# Altium PCB 变压器电源.PcbDoc
Units mm, origin at the board's own origin, x right, y up, seen from the top; angles counter-clockwise.
Board outline 152.4 x 101.6 mm, 2 copper layers (Top Layer, Bottom Layer); 46 components, 17 nets, 139 pads, 0 vias.
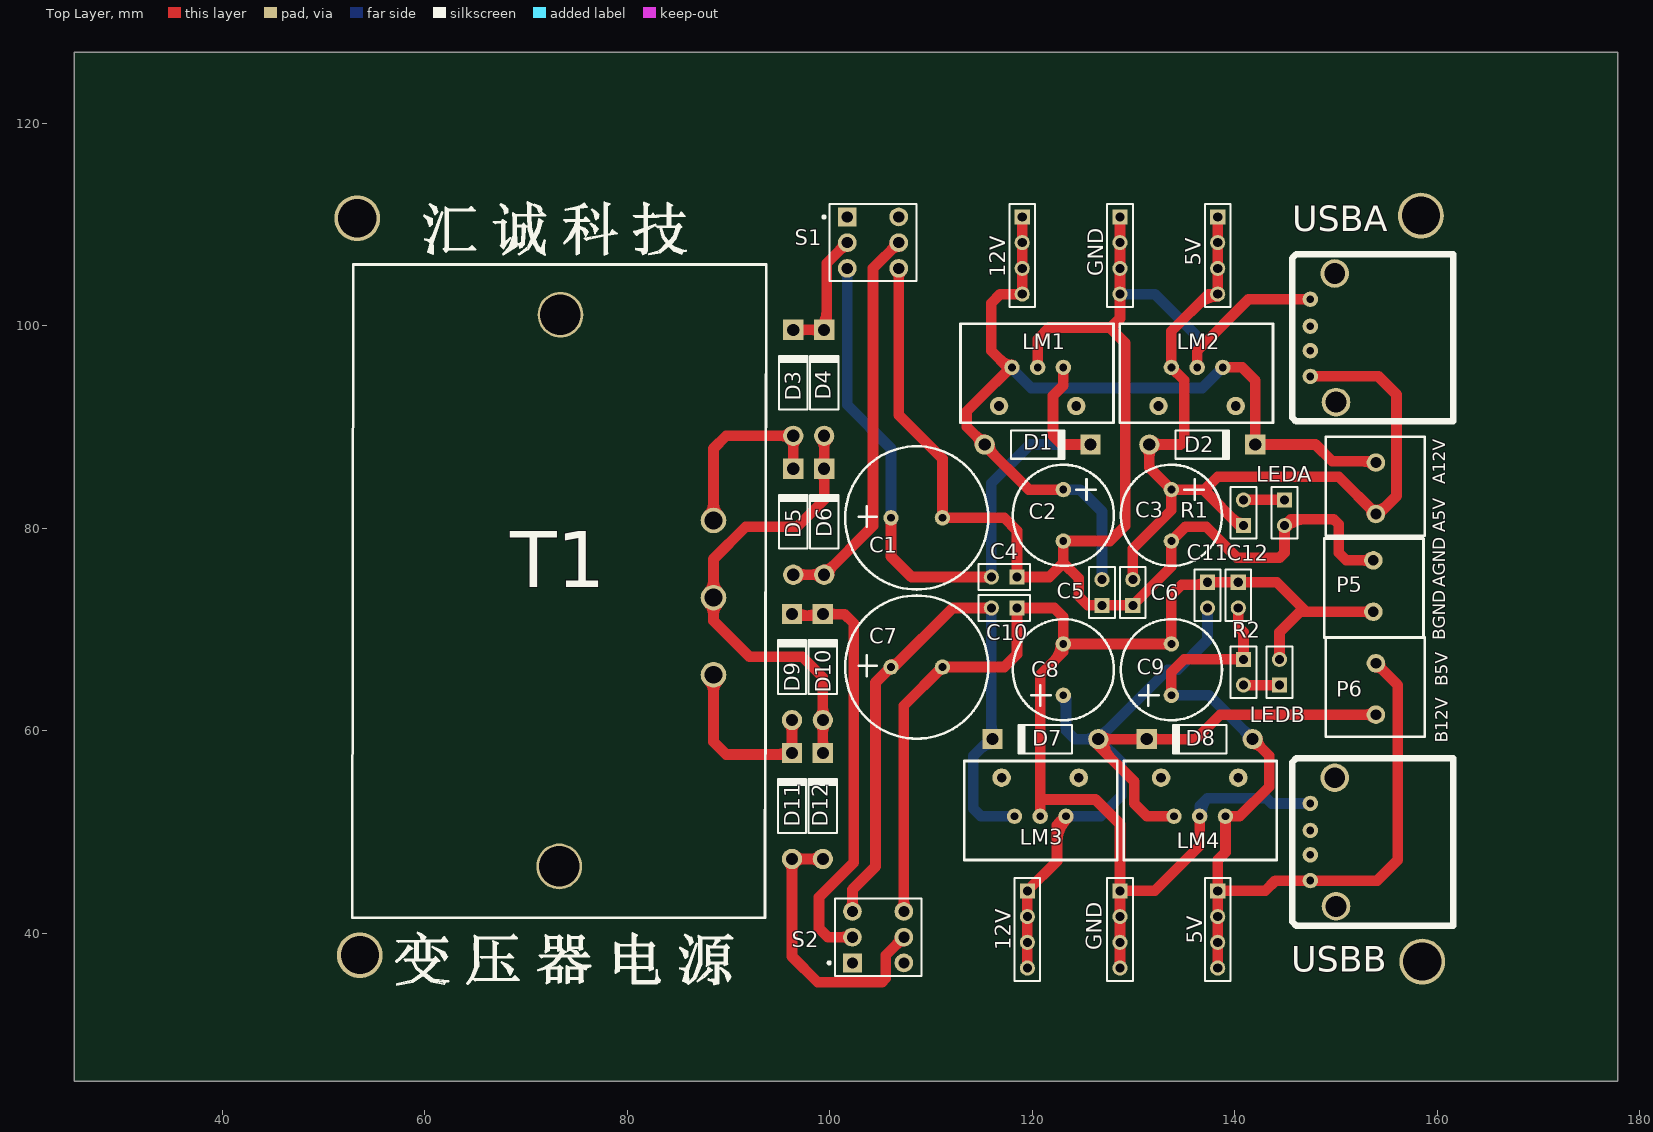
[diagram p0: Top Layer view]
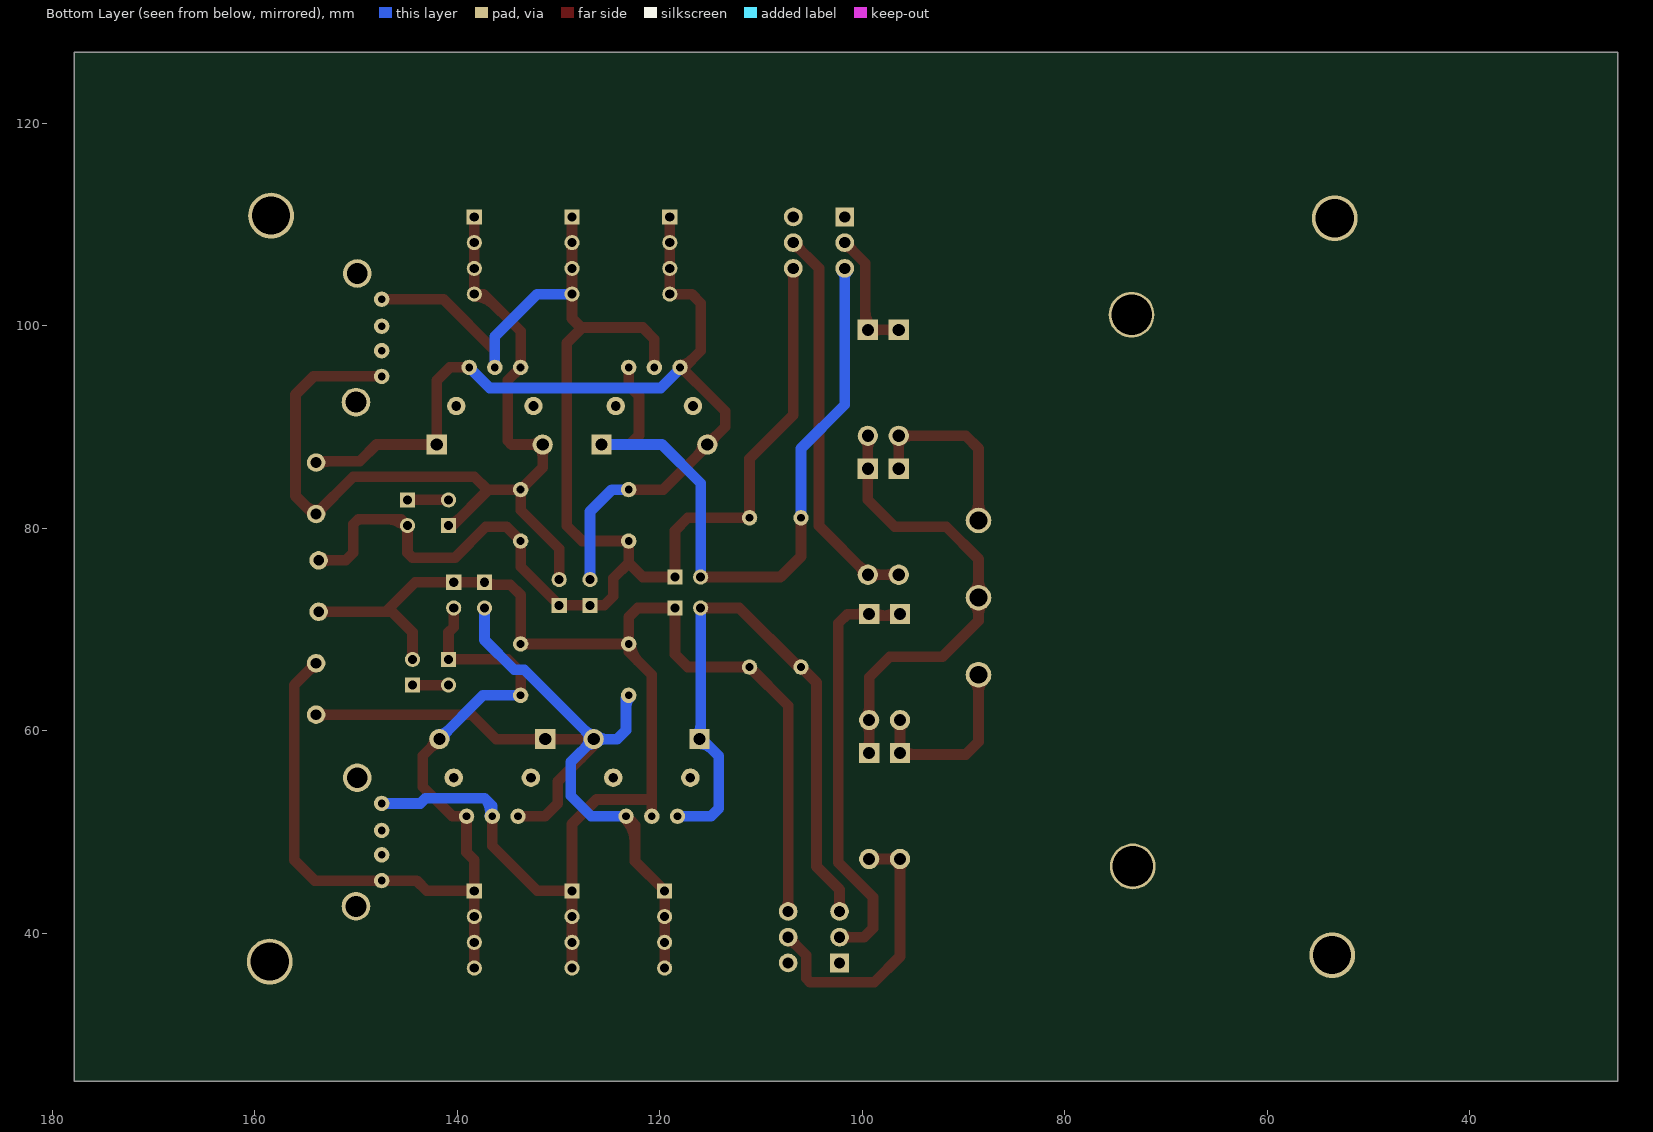
[diagram p1: Bottom Layer view, seen from below]

## Layer stack, top to bottom
Top Layer: signal copper 0.0356
Dielectric: dielectric 0.32, FR-4, Dk 4.8
Bottom Layer: signal copper 0.0356

## Board outline
25.4,25.4 177.8,25.4 177.8,127 25.4,127

## Design rules (kind name [scope] priority, off if disabled: settings)
Clearance [All] p1: gap=0.254
ComponentClearance [All] p1: gap=0.254 collisioncheckmode=3 verticalgap=0.254
PolygonConnect [All] p1: connectstyle=Relief reliefconductorwidth=0.254 reliefentries=4 polygonreliefangle="90 Angle"
RoutingVias [All] p1: holewidth=0.711 width=1.27 viastyle="Through Hole" minholewidth=0.711 minwidth=1.27 maxholewidth=0.711 maxwidth=1.27
SolderMaskExpansion [All] p1: expansion=0.102
TestPointUsage [All] p1: valid=0 allowmultiple=FALSE
Testpoint [All] p1: side=15 testpointundercomponent=TRUE minsize=1.016 maxsize=2.54 preferedsize=1.524 minholesize=0 maxholesize=1.016 preferedholesize=0.813 testpointgrid=0.025 style=1023 order=0123456789
Width [All] p1: maxlimit=1.054 minlimit=1.054 preferedwidth=1.054
17 further rules are at their usual default settings.

## Classes and differential pairs
component class 变压器电源: 5V 12V A12V C1 C2 C3 C4 C5 C6 C7 C8 C9 C10 C11 C12 D1 D2 D3 D4 D5 D6 D7 D8 D9 D10 D11 D12 GND LEDA LEDB LM1 LM2 LM3 LM4 P5 P6 R1 R2 S1 S2 T1

## Components (designator, comment, footprint, x,y, rotation, side; value= is the part's Value field where it differs from the comment)
5V "Header 4" HDR1X4 138.303,44.196 r270 top (schematic designator P8)
5V "Header 4" HDR1X4 138.303,110.744 r270 top (schematic designator P2)
12V "Header 4" HDR1X4 119.507,44.196 r270 top (schematic designator P7)
12V "Header 4" HDR1X4 118.999,110.744 r270 top (schematic designator P1)
A12V "Header 2" PCBComponent_1 153.289,81.915 r270 top (schematic designator P4)
C1 "" "C 2200/50" 101.219,80.264 r90 top
C2 "" "C 220/50" 123.063,83.82 r0 top
C3 "" "C 220/50" 133.731,83.82 r0 top
C4 "" HDR1X2 118.491,75.184 r180 top
C5 "" HDR1X2 126.873,72.39 r90 top
C6 "" HDR1X2 129.921,72.39 r90 top
C7 "" "C 2200/50" 101.219,65.532 r90 top
C8 "" "C 220/50" 123.063,63.5 r180 top
C9 "" "C 220/50" 133.731,63.5 r180 top
C10 "" HDR1X2 118.491,72.136 r180 top
C11 "" HDR1X2 137.287,74.676 r270 top
C12 "" HDR1X2 140.335,74.676 r270 top
D1 "" DIO10.46-5.3x2.8 120.523,88.265 r0 top
D2 "" DIO10.46-5.3x2.8 136.779,88.265 r0 top
D3 "" DIO10.46-5.3x2.8 96.393,94.361 r90 top
D4 "" DIO10.46-5.3x2.8 99.441,94.361 r90 top
D5 "" DIO10.46-5.3x2.8 96.393,80.645 r90 top
D6 "" DIO10.46-5.3x2.8 99.441,80.645 r90 top
D7 "" DIO10.46-5.3x2.8 121.285,59.182 r180 top
D8 "" DIO10.46-5.3x2.8 136.525,59.182 r180 top
D9 "" DIO10.46-5.3x2.8 96.266,66.294 r90 top
D10 "" DIO10.46-5.3x2.8 99.314,66.294 r90 top
D11 "" DIO10.46-5.3x2.8 96.266,52.578 r90 top
D12 "" DIO10.46-5.3x2.8 99.314,52.578 r90 top
GND "Header 4" HDR1X4 128.651,44.196 r270 top (schematic designator P9)
GND "Header 4" HDR1X4 128.651,110.744 r270 top (schematic designator P3)
LEDA "" HDR1X2 144.907,82.804 r270 top (schematic designator DS1)
LEDB "" HDR1X2 144.399,64.516 r90 top (schematic designator DS2)
LM1 "" wyk 120.523,95.885 r180 top
LM2 "" wyk 136.271,95.885 r180 top
LM3 "" wyk 120.777,51.562 r0 top
LM4 "" wyk 136.525,51.562 r0 top
P5 "Header 2" PCBComponent_1 154.305,76.327 r90 top
P6 "Header 2" PCBComponent_1 153.289,62.103 r270 top
R1 "10k" HDR1X2 140.843,80.264 r90 top
R2 "10k" HDR1X2 140.843,67.056 r270 top
S1 "" DPDT-6#1 104.267,108.204 r0 top
S2 "" DPDT-6#2 104.775,39.624 r0 top
T1 "Trans CT Ideal" T 78.359,65.532 r0 top
USBA "Comment" USB 147.447,100.076 r90 top
USBB "Comment" USB 147.447,50.292 r90 top

## Footprints (in the part's own frame and the unit in brackets; to place one, negate y for a bottom-side part, rotate by r counter-clockwise, add the part's x,y. Pads: shape width x height; smd on the part's side, far side on the other; paste and mask are expansions set on the pad)
"C 220/50" [mil]
  round 60 hole 30: 1(0,0) 2(0,-200)
  silkscreen extent -196,-297 197,97
"C 2200/50" [mil]
  round 60 hole 30: 1(30,-190) 2(30,-390)
  silkscreen extent -248,-568 308,-12
DIO10.46-5.3x2.8 [mm] "Diode, Axial; Body 5.2 x 2.7 mm (LxDia. max), Lead Dia. 0.86 mm (max)"
  round 2 hole 1.2: 1(-5.23,0)
  rect 2x2 hole 1.2: 2(5.23,0)
  silkscreen extent -2.65,-1.4 2.75,1.4
DPDT-6#1 [mm] "Double-Pole, Double-Throw Switch; 6 Leads"
  rect 1.85x1.85 hole 1.1: 1(-2.54,2.54)
  round 1.85 hole 1.1: 2(-2.54,0) 3(-2.54,-2.54) 4(2.54,-2.54) 5(2.54,0) 6(2.54,2.54)
  silkscreen extent -4.96,-3.81 4.28,3.81
DPDT-6#2 [mm] "Double-Pole, Double-Throw Switch; 6 Leads"
  rect 1.85x1.85 hole 1.1: 1(-2.54,-2.54)
  round 1.85 hole 1.1: 2(-2.54,0) 3(-2.54,2.54) 4(2.54,2.54) 5(2.54,0) 6(2.54,-2.54)
  silkscreen extent -4.96,-3.81 4.28,3.81
HDR1X2 [mm] "Connector; Header; 2 Position"
  rect 1.5x1.5 hole 0.9: 1(0,0)
  round 1.5 hole 0.9: 2(2.54,0)
  silkscreen extent -1.27,-1.27 3.81,1.27
HDR1X4 [mm] "Connector; Header; 4 Position"
  rect 1.5x1.5 hole 0.9: 1(0,0)
  round 1.5 hole 0.9: 2(2.54,0) 3(5.08,0) 4(7.62,0)
  silkscreen extent -1.27,-1.27 8.89,1.27
PCBComponent_1 [mil]
  round 71.81 hole 41.81: 1(-180,25) 2(20,25)
  silkscreen extent -280,-170 105,215
T [mm]
  round 4.524 hole 4: 0(-5.08,-18.923) 0(-4.953,35.56)
  round 2.524 hole 1.762: 3(10.16,15.24) 4(10.16,7.62) 5(10.16,0)
  silkscreen extent -25.53,-24 15.37,40.51
USB [mil]
  round 111.18 hole 81.18: 0(-300,-100) 0(200,-95)
  round 60 hole 30: 1(-200,0) 2(-100,0) 3(-5,0) 4(100,0)
  silkscreen extent -375,-555 275,70
wyk [mil]
  round 71.81 hole 37.87: 0(-150,150) 0(150,150)
  round 60 hole 30: 1(-100,0) 2(100,0) 3(0,0)
  silkscreen extent -295,-170 300,215

## Part data
5V 5V 12V 12V GND GND: "Header, 4-Pin"
A12V P5 P6: "Header, 2-Pin"
C1 C2 C3 C7 C8 C9: library part "Cap Pol1", "Polarized Capacitor (Radial)"
C4 C5 C6 C10 C11 C12: library part Cap, "Capacitor"
D1 D2 D3 D4 D5 D6 D7 D8 D9 D10 D11 D12: library part "Diode 1N4007", "1 Amp General Purpose Rectifier"
LEDA LEDB: library part LED0, "Typical INFRARED GaAs LED"
LM1 LM2 LM3 LM4: library part "Volt Reg", "Voltage Regulator"
R1 R2: library part RES1
S1 S2: library part "SW DPDT", "Switch"
T1: "Center-Tapped Transformer (Ideal)"

## Free pads (board coordinates)
  round 4.524 hole 3.762: 6(53.34,110.617) 6(53.594,37.846) 6(158.369,110.871) 6(158.496,37.211)

## Nets (pads, with @x,y where several pads share a name; then routed paths per layer and width w, separated by ;. In a path a pad name is that pad's centre, name@x,y a point inside that pad or via, vN(x,y) a via of type N, cw(c..) or ccw(c..) an arc to the next point about the centre after c; other vN are vias at no path point)
A05: 5V.1@138.303,110.744 5V.2@138.303,108.204 5V.3@138.303,105.664 5V.4@138.303,103.124 A12V.2 C3.1 C6.2 D2.1 LM2.2 R1.1 USBA.1 | length 105
  Top Layer w1.054: C6.2 129.921,77.978 133.731,81.788 C3.1 ; D2.1@131.215,87.931 cw(c130.407,87.123) 131.549,87.123 cw(c132.691,87.123) 131.883,87.931 cw(c132.691,87.123) 132.691,88.265 cw(c132.691,89.407) D2.1@131.883,88.599 ; 136.405,102.115 cw(c138.303,100.216) 5V.4@138.303,102.901 ; 136.906,83.82 140.462,80.264 R1.1 ; 136.97,102.68 cw(c137.769,101.88) 5V.4@138.215,102.919 ; 5V.1@138.303,110.744 138.303,103.124 137.414,103.124 133.731,99.441 LM2.2 135.001,94.615 135.001,88.646 134.62,88.265 D2.1 131.549,86.002 C3.1 ; 139.812,80.914 ccw(c140.843,81.945) R1.1@140.843,80.487 ; USBA.1 154.178,94.996 155.956,93.218 155.956,83.185 154.178,81.407 A12V.2 150.241,85.09 138.303,85.09 137.033,83.82 C3.1 ; A12V.2@153.539,81.407 ccw(c152.61,81.407) 153.267,82.064 ccw(c153.924,82.721) 153.924,81.792 ccw(c153.924,83.335) 155.015,82.244
A12: 12V.1@118.999,110.744 12V.2@118.999,108.204 12V.3@118.999,105.664 12V.4@118.999,103.124 A12V.1 C2.1 C5.2 D1.1 D2.2 LM1.2 LM2.1 | length 109.3
  Top Layer w1.054: LM1.2@117.856,95.885 114.808,92.837 113.538,91.567 113.538,90.02 D1.1 115.293,88.161 119.634,83.82 C2.1 ; LM1.2 117.602,95.885 115.951,97.536 115.951,102.235 116.84,103.124 118.999,103.124 12V.1@118.999,110.744 ; LM2.1 140.716,95.885 142.009,94.592 D2.2 147.955,88.265 149.606,86.614 A12V.1@154.178,86.614 ; D2.2@141.675,88.599 ccw(c140.867,89.407) 142.009,89.407 ccw(c143.151,89.407) 142.343,88.599 ccw(c143.151,89.407) 143.151,88.265 ccw(c143.151,87.123) D2.2@142.343,87.931 ; 152.688,86.614 cw(c152.688,85.251) A12V.1@153.652,86.215 ; 114.486,89.072 cw(c113.678,88.265) 114.82,88.265 ccw(c113.678,88.265) 114.486,89.072 ; 114.486,89.072 ccw(c115.293,89.88) 115.293,88.738 cw(c115.293,89.88) 114.486,89.072 ; D1.1@115.766,88.265 ccw(c117.159,88.265) 116.174,87.28 cw(c117.159,88.265) D1.1@115.766,88.265 ; 116.931,96.556 ccw(c117.983,97.607) 117.983,96.12 cw(c117.983,97.607) 116.931,96.556 ; 117.365,95.394 cw(c117.983,94.776) 117.983,95.65 ccw(c117.983,94.776) 117.365,95.394
  Bottom Layer w1.054: LM1.2 117.983,95.758 119.888,93.853 136.779,93.853 LM2.1 ; C2.1 124.714,83.82 126.873,81.661 C5.2
AGND: C1.2 C2.2 C3.2 C4.1 C5.1 C6.1 GND.1@128.651,110.744 GND.2@128.651,108.204 GND.3@128.651,105.664 GND.4@128.651,103.124 LEDA.2 LM1.3 LM2.3 P5.2 S1.4 USBA.4 | length 174.6
  Top Layer w1.054: S1.4 106.807,91.186 111.125,86.868 C1.2 117.221,81.026 118.491,79.756 C4.1 121.666,75.184 123.063,76.581 ; LM1.3 120.523,98.679 121.666,99.822 127.762,99.822 ; GND.1@128.651,110.744 128.651,100.711 127.762,99.822 ; LM2.3 136.271,97.536 141.351,102.616 USBA.4 ; LEDA.2@145.065,80.106 cw(c146.978,78.193) 146.978,80.899 ; P5.2@153.398,76.563 ccw(c152.741,75.906) 152.741,76.835 ccw(c152.741,77.764) P5.2@153.398,77.107 ; P5.2 151.003,76.835 150.241,77.597 150.241,80.391 149.733,80.899 145.542,80.899 LEDA.2 144.907,77.597 144.399,77.089 140.208,77.089 137.16,80.137 135.128,80.137 C3.2 133.731,76.2 C6.1 125.476,72.39 124.587,73.279 124.587,75.057 123.063,76.581 ; 106.807,104.703 cw(c107.768,104.703) 107.088,105.383 ccw(c107.768,104.703) 106.807,104.703 ; 106.807,104.703 ccw(c105.846,104.703) 106.526,105.383 cw(c105.846,104.703) 106.807,104.703 ; 123.063,76.581 C2.2 127.635,78.74 129.159,80.264 129.159,98.298 127.762,99.695 127.762,99.822
  Bottom Layer w1.054: GND.4@128.651,103.124 132.08,103.124 136.271,98.933 LM2.3
B05: 5V.1@138.303,44.196 5V.2@138.303,41.656 5V.3@138.303,39.116 5V.4@138.303,36.576 C9.1 C12.2 D8.1 LM4.2 P6.1 R2.1 USBB.1 | length 95.6
  Top Layer w1.054: C9.1 133.731,65.786 135.001,67.056 R2.1 140.843,69.723 140.335,70.231 C12.2 ; 5V.4@138.303,36.576 138.303,47.244 139.065,48.006 LM4.2 140.462,51.562 143.383,54.483 143.383,57.554 D8.1 ; 5V.1@138.303,44.196 143.002,44.196 144.018,45.212 154.051,45.212 156.083,47.244 156.083,64.516 P6.1 ; D8.1@141.755,58.709 cw(c141.755,57.567) 142.562,58.375 cw(c143.37,59.182) D8.1@142.228,59.182 ; P6.1@153.924,66.29 cw(c153.924,65.361) 154.581,66.018 cw(c155.238,66.675) P6.1@154.309,66.675
  Bottom Layer w1.054: C9.1 137.437,63.5 D8.1 ; D8.1@141.282,59.182 ccw(c140.14,59.182) 140.948,59.989 ccw(c141.755,60.797) D8.1@141.755,59.655
B12: 12V.1@119.507,44.196 12V.2@119.507,41.656 12V.3@119.507,39.116 12V.4@119.507,36.576 C8.1 C11.2 D7.1 D8.2 LM3.2 LM4.1 P6.2 | length 121.2
  Top Layer w1.054: 12V.4@119.507,36.576 119.507,44.196 122.428,47.117 122.428,50.673 LM3.2 ; D7.1@126.849,58.848 cw(c127.657,58.04) 127.657,59.182 cw(c127.657,60.324) D7.1@126.849,59.516 ; D7.1@126.988,59.182 ccw(c129.719,59.182) 127.788,57.251 ; D8.2@130.961,58.848 ccw(c130.153,58.04) 130.153,59.182 ccw(c130.153,60.324) D8.2@130.961,59.516 ; D8.2@131.629,58.848 cw(c132.437,58.04) 132.437,59.182 cw(c132.437,60.324) D8.2@131.629,59.516 ; LM4.1 131.318,51.562 130.048,52.832 130.048,54.991 126.515,58.524 D7.1 136.144,59.182 138.557,61.595 P6.2 ; P6.2@153.652,61.323 ccw(c152.995,60.666) 152.995,61.595 ccw(c152.995,62.524) P6.2@153.652,61.867 ; 122.428,48.848 cw(c126.031,48.848) 123.483,51.396 ccw(c126.031,48.848) 122.428,48.848 ; 122.428,50.305 cw(c123.458,50.305) 123.343,51.328 ccw(c123.458,50.305) 122.428,50.305
  Bottom Layer w1.054: C8.1@122.897,63.334 cw(c121.882,62.319) 123.317,62.319 ; C8.1 123.317,63.246 123.317,60.071 124.206,59.182 D7.1 133.373,66.04 134.366,66.04 137.287,68.961 C11.2 ; LM3.2 126.746,51.562 128.778,53.594 128.778,56.919 D7.1@126.619,59.078 ; D7.1@126.181,58.848 ccw(c125.373,58.04) 125.373,59.182 ccw(c125.373,60.324) D7.1@126.181,59.516 ; D7.1@126.365,59.286 D7.1@126.492,59.159 ; D7.1@126.515,59.655 ccw(c126.515,60.797) 127.322,59.989 ccw(c128.13,59.182) D7.1@126.988,59.182 ; D7.1@126.988,59.182 ccw(c128.13,59.182) 127.322,58.375 ; D7.1@126.988,59.182 ccw(c128.13,59.182) 127.322,58.375 ; 127.322,58.375 ccw(c126.515,57.567) 126.515,58.709 cw(c126.515,57.567) 127.322,58.375
BGND: C7.2 C8.2 C9.2 C10.1 C11.1 C12.1 GND.1@128.651,44.196 GND.2@128.651,41.656 GND.3@128.651,39.116 GND.4@128.651,36.576 LEDB.2 LM3.3 LM4.3 P5.1 S2.4 USBB.4 | length 166.4
  Top Layer w1.054: S2.4 107.315,62.484 C7.2 114.554,66.294 117.221,66.294 118.491,67.564 C10.1 122.174,72.136 123.063,71.247 123.063,67.818 120.777,65.532 LM3.3 ; 120.777,53.213 126.238,53.213 128.651,50.8 GND.4@128.651,36.576 ; C8.2 C9.2 133.731,73.406 134.747,74.422 137.033,74.422 C11.1 144.145,74.676 146.812,72.009 146.812,71.755 ; GND.1@128.651,44.196 132.08,44.196 136.525,48.641 LM4.3 ; 136.135,74.422 ccw(c136.135,75.828) C11.1@137.129,74.834 ; LEDB.2 144.399,69.723 146.431,71.755 P5.1 ; P5.1@153.398,71.483 ccw(c152.741,70.826) 152.741,71.755 ccw(c152.741,72.684) P5.1@153.398,72.027 ; 107.315,43.125 cw(c106.354,43.125) 107.034,42.445 ccw(c106.354,43.125) 107.315,43.125 ; 107.315,43.125 ccw(c108.276,43.125) 107.596,42.445 cw(c108.276,43.125) 107.315,43.125 ; 122.123,66.878 ccw(c120.421,68.58) 122.828,68.58 cw(c120.421,68.58) 122.123,66.878
  Bottom Layer w1.054: LM4.3 136.525,52.578 137.287,53.34 ; LM4.3@136.756,51.607 cw(c138.654,51.973) 137.287,53.34 ; USBB.4 143.637,52.832 143.129,53.34 137.287,53.34
NetC1_1: C1.1 C4.2 D1.2 LM1.1 S1.3 | length 83.4
  Top Layer w1.054: S1.3 S1.3@101.727,105.791 ; C1.1 106.045,77.216 108.077,75.184 C4.2 C4.2@115.824,75.311 ; LM1.1 123.063,94.107 122.047,93.091 122.047,89.154 122.936,88.265 D1.2 ; 124.611,88.265 cw(c124.611,87.123) 125.419,87.931 ccw(c124.611,87.123) 124.611,88.265 ; 124.611,88.265 ccw(c124.611,89.407) 125.419,88.599 cw(c124.611,89.407) 124.611,88.265
  Bottom Layer w1.054: S1.3 101.727,92.202 106.045,87.884 C1.1 ; C4.2 115.951,84.455 119.761,88.265 D1.2 ; 101.727,104.703 cw(c102.688,104.703) 102.008,105.383 ccw(c102.688,104.703) 101.727,104.703 ; 101.727,104.703 ccw(c100.766,104.703) 101.446,105.383 cw(c100.766,104.703) 101.727,104.703 ; 124.611,88.265 cw(c124.611,87.123) 125.419,87.931 ccw(c124.611,87.123) 124.611,88.265 ; 124.611,88.265 ccw(c124.611,89.407) 125.419,88.599 cw(c124.611,89.407) 124.611,88.265
NetC7_1: C7.1 C10.2 D7.2 LM3.1 S2.3 | length 72.8
  Top Layer w1.054: S2.3 102.235,44.323 104.521,46.609 104.521,64.77 C7.1 106.299,66.294 112.141,72.136 C10.2 ; 102.235,43.125 cw(c101.274,43.125) 101.954,42.445 ccw(c101.274,43.125) 102.235,43.125 ; 102.235,43.125 ccw(c103.196,43.125) 102.516,42.445 cw(c103.196,43.125) 102.235,43.125 ; C7.1@106.045,66.529 ccw(c106.045,67.71) 106.88,66.875 cw(c106.045,67.71) C7.1@106.045,66.529
  Bottom Layer w1.054: C10.2 115.951,59.286 114.173,57.508 114.173,52.324 114.935,51.562 LM3.1 ; 114.892,58.227 cw(c116.055,57.065) 116.055,58.709 ccw(c116.055,57.065) 114.892,58.227 ; 115.951,60.575 ccw(c117.448,60.575) 116.389,59.516 cw(c117.448,60.575) 115.951,60.575
NetD3_1: D3.1 D5.2 T1.3 | length 35.1
  Top Layer w1.054: T1.3 88.519,87.884 89.766,89.131 D3.1 D5.2 ; 88.519,82.546 cw(c86.745,82.546) 87.999,81.292 ccw(c86.745,82.546) 88.519,82.546 ; 88.519,82.546 ccw(c90.293,82.546) 89.039,81.292 cw(c90.293,82.546) 88.519,82.546 ; 95.251,89.131 cw(c95.251,87.989) D3.1@96.059,88.797 ; 95.251,89.131 ccw(c95.251,90.273) 96.059,89.465 cw(c95.251,90.273) 95.251,89.131 ; 95.251,89.131 cw(c95.251,87.989) D3.1@96.059,88.797 ; D3.1@96.059,88.797 cw(c95.251,87.989) 96.393,87.989 ; D3.1@96.059,88.797 cw(c95.251,87.989) 96.393,87.989 ; 96.393,87.017 cw(c95.251,87.017) 96.059,86.209 ccw(c95.251,87.017) 96.393,87.017 ; 96.393,87.017 ccw(c97.535,87.017) 96.727,86.209 cw(c97.535,87.017) 96.393,87.017 ; 96.393,87.989 cw(c97.535,87.989) 96.727,88.797 ccw(c97.535,87.989) 96.393,87.989
NetD3_2: D3.2 D4.2 S1.2 | length 26
  Top Layer w1.054: D3.2 99.591,99.591 99.695,99.695 99.695,106.172 S1.2 ; 97.535,99.591 cw(c97.535,100.733) 96.727,99.925 ccw(c97.535,100.733) 97.535,99.591 ; 97.535,99.591 ccw(c97.535,98.449) 96.727,99.257 cw(c97.535,98.449) 97.535,99.591 ; 98.299,99.591 cw(c98.299,98.449) 99.107,99.257 ccw(c98.299,98.449) 98.299,99.591 ; 98.299,99.591 ccw(c98.299,100.733) D4.2@99.107,99.925 ; 98.299,99.591 ccw(c98.299,100.733) D4.2@99.107,99.925 ; D4.2@99.107,99.925 ccw(c97.686,101.346) 99.695,101.346 cw(c97.686,101.346) D4.2@99.107,99.925 ; 101.048,107.525 cw(c101.727,106.845) 101.727,107.806 ccw(c101.727,106.845) 101.048,107.525 ; 101.048,107.525 ccw(c100.368,108.204) 101.329,108.204 cw(c100.368,108.204) 101.048,107.525
NetD4_1: D4.1 D6.2 D10.1 D12.2 T1.4 | length 79.2
  Top Layer w1.054: D12.2@99.187,57.658 99.314,57.785 99.314,65.278 97.282,67.31 92.075,67.31 88.519,70.866 88.519,76.962 91.694,80.137 96.774,80.137 99.441,82.804 D4.1 ; 88.519,71.378 cw(c90.293,71.378) 89.039,72.632 ccw(c90.293,71.378) 88.519,71.378 ; 88.519,71.378 ccw(c86.745,71.378) 87.999,72.632 cw(c86.745,71.378) 88.519,71.378 ; 88.519,74.926 cw(c86.745,74.926) 87.999,73.672 ccw(c86.745,74.926) 88.519,74.926 ; 88.519,74.926 ccw(c90.293,74.926) 89.039,73.672 cw(c90.293,74.926) 88.519,74.926 ; 99.314,58.95 cw(c98.172,58.95) 98.98,58.142 ccw(c98.172,58.95) 99.314,58.95 ; 99.314,58.95 ccw(c100.456,58.95) 99.648,58.142 cw(c100.456,58.95) 99.314,58.95 ; 99.314,59.922 cw(c100.456,59.922) 99.648,60.73 ccw(c100.456,59.922) 99.314,59.922 ; 99.314,59.922 ccw(c98.172,59.922) 98.98,60.73 cw(c98.172,59.922) 99.314,59.922 ; 99.314,62.206 cw(c98.172,62.206) 98.98,61.398 ccw(c98.172,62.206) 99.314,62.206 ; 99.314,62.206 ccw(c100.456,62.206) 99.648,61.398 cw(c100.456,62.206) 99.314,62.206 ; 99.441,84.733 cw(c100.583,84.733) 99.775,85.541 ccw(c100.583,84.733) 99.441,84.733 ; 99.441,84.733 ccw(c98.299,84.733) 99.107,85.541 cw(c98.299,84.733) 99.441,84.733 ; 99.441,87.017 cw(c98.299,87.017) 99.107,86.209 ccw(c98.299,87.017) 99.441,87.017 ; 99.441,87.017 ccw(c100.583,87.017) 99.775,86.209 cw(c100.583,87.017) 99.441,87.017 ; 99.441,87.989 cw(c100.583,87.989) 99.775,88.797 ccw(c100.583,87.989) 99.441,87.989 ; 99.441,87.989 ccw(c98.299,87.989) 99.107,88.797 cw(c98.299,87.989) 99.441,87.989
NetD5_1: D5.1 D6.1 S1.5 | length 52.7
  Top Layer w1.054: D5.1 D6.1 104.267,80.241 104.267,105.664 S1.5 ; 97.535,75.415 cw(c97.535,76.557) 96.727,75.749 ccw(c97.535,76.557) 97.535,75.415 ; 97.535,75.415 ccw(c97.535,74.273) 96.727,75.081 cw(c97.535,74.273) 97.535,75.415 ; 98.299,75.415 cw(c98.299,74.273) 99.107,75.081 ccw(c98.299,74.273) 98.299,75.415 ; 98.299,75.415 ccw(c98.299,76.557) 99.107,75.749 cw(c98.299,76.557) 98.299,75.415 ; 100.248,76.222 cw(c99.441,77.03) 99.441,75.888 ccw(c99.441,77.03) 100.248,76.222 ; 100.248,76.222 ccw(c101.056,75.415) 99.914,75.415 cw(c101.056,75.415) 100.248,76.222 ; 106.128,107.525 cw(c106.807,106.845) 106.807,107.806 ccw(c106.807,106.845) 106.128,107.525 ; 106.128,107.525 ccw(c105.448,108.204) 106.409,108.204 cw(c105.448,108.204) 106.128,107.525
NetD9_1: D9.1 D11.2 T1.5 | length 33.5
  Top Layer w1.054: T1.5 88.519,58.928 89.789,57.658 96.116,57.658 D11.2 D9.1 ; 88.519,63.758 cw(c90.293,63.758) 89.039,65.012 ccw(c90.293,63.758) 88.519,63.758 ; 88.519,63.758 ccw(c86.745,63.758) 87.999,65.012 cw(c86.745,63.758) 88.519,63.758 ; D11.2@95.932,58.142 ccw(c95.124,58.95) 96.266,58.95 ; D11.2@95.932,58.142 cw(c94.762,59.312) 94.762,57.658 ccw(c94.762,59.312) D11.2@95.932,58.142 ; D11.2@95.932,58.142 ccw(c95.124,58.95) 96.266,58.95 ; 96.266,58.95 ccw(c97.408,58.95) 96.6,58.142 cw(c97.408,58.95) 96.266,58.95 ; 96.266,59.922 cw(c97.408,59.922) 96.6,60.73 ccw(c97.408,59.922) 96.266,59.922 ; 96.266,59.922 ccw(c95.124,59.922) 95.932,60.73 cw(c95.124,59.922) 96.266,59.922
NetD9_2: D9.2 D10.2 S2.2 | length 53.5
  Top Layer w1.054: D9.2@96.139,71.374 D10.2@99.164,71.374 ; D10.2 101.45,71.524 102.362,70.612 102.362,46.99 98.933,43.561 98.933,40.513 99.822,39.624 S2.2 ; 100.456,71.524 cw(c100.456,72.666) 99.648,71.858 ccw(c100.456,72.666) 100.456,71.524 ; 100.456,71.524 ccw(c100.456,70.382) 99.648,71.19 cw(c100.456,70.382) 100.456,71.524 ; 101.274,39.624 cw(c101.274,38.663) 101.954,39.343 ccw(c101.274,38.663) 101.274,39.624 ; 101.274,39.624 ccw(c101.274,40.585) 101.954,39.905 cw(c101.274,40.585) 101.274,39.624 ; D9.2@96.6,71.858 ccw(c97.77,73.028) 97.77,71.374 cw(c97.77,73.028) D9.2@96.6,71.858 ; 97.81,71.374 ccw(c97.81,73.028) 98.98,71.858 cw(c97.81,73.028) 97.81,71.374
  Bottom Layer w1.054: D10.2 D10.2@99.337,71.501
NetD11_1: D11.1 D12.1 S2.5 | length 42.1
  Top Layer w1.054: D12.1@99.291,47.348 D11.1 96.266,37.719 98.806,35.179 105.156,35.179 105.537,35.56 105.537,37.846 S2.5 S2.5@106.934,39.624 ; 96.266,46.206 cw(c97.408,46.206) D11.1@96.6,47.014 ; 96.266,46.206 ccw(c95.124,46.206) 95.932,47.014 cw(c95.124,46.206) 96.266,46.206 ; 96.266,46.206 cw(c97.408,46.206) D11.1@96.6,47.014 ; D11.1@96.6,47.014 cw(c97.408,46.206) 97.408,47.348 ; D11.1@96.6,47.014 cw(c97.408,46.206) 97.408,47.348 ; 97.408,47.348 cw(c97.408,48.49) 96.6,47.682 ccw(c97.408,48.49) 97.408,47.348 ; 98.172,47.348 cw(c98.172,46.206) 98.98,47.014 ccw(c98.172,46.206) 98.172,47.348 ; 98.172,47.348 ccw(c98.172,48.49) 98.98,47.682 cw(c98.172,48.49) 98.172,47.348 ; 106.636,38.945 cw(c107.315,38.265) 107.315,39.226 ccw(c107.315,38.265) 106.636,38.945 ; 106.636,38.945 ccw(c105.956,39.624) 106.917,39.624 cw(c105.956,39.624) 106.636,38.945
NetDS1_1: LEDA.1 R1.2 | length 4.1
  Top Layer w1.054: R1.2 LEDA.1
NetDS2_1: LEDB.1 R2.2 | length 3.6
  Top Layer w1.054: R2.2 LEDB.1
pads on no net: LM1.0 LM2.0 LM3.0 LM4.0 S1.1 S1.6 S2.1 S2.6 T1.0 USBA.0 USBA.2 USBA.3 USBB.0 USBB.2 USBB.3

## Silkscreen, mask and mechanical layers (free items; w line width, h text height)
Top Overlay:
  drawing of 1503 lines, arcs and shapes, not listed
  text "A5V" at 160.782,79.629 h1.22 r90
  text "AGND" at 160.782,74.168 h1.22 r90
  text "BGND" at 160.782,68.961 h1.22 r90
  text "B5V" at 161.036,64.389 h1.22 r90
  text "B12V" at 161.036,58.801 h1.22 r90
Mechanical 1:
  lines w0.254: 45.598,107.948 46.101,109.474 ; 45.842,40.384 46.355,38.862 ; 45.847,109.473 46.355,109.475 ; 46.101,38.861 46.609,38.863 ; 46.197,82.827 46.101,109.474 ; 46.259,65.509 46.355,38.862 ; 46.614,107.952 46.101,109.474 ; 46.858,40.388 46.355,38.862 ; 49.316,118.131 49.318,118.639 ; 50.84,117.873 49.317,118.385 ; 50.842,118.889 49.317,118.385 ; 96.729,118.278 49.317,118.385 ; 115.062,118.237 162.474,118.131 ; 160.949,117.626 162.474,118.131 ; 160.951,118.642 162.474,118.131 ; 162.473,117.877 162.475,118.385
  lines w0.654: 49.403,33.655 162.56,33.528 162.433,114.681 49.403,114.681 49.403,33.655
  text "113.1573 (mm)" at 96.981,117.363 h1.52 r359.87
  text "70.6125 (mm)" at 45.284,82.569 h1.52 r270.21